# EAGLE board BLDC_logic_v1 (EAGLE 9.6.2)
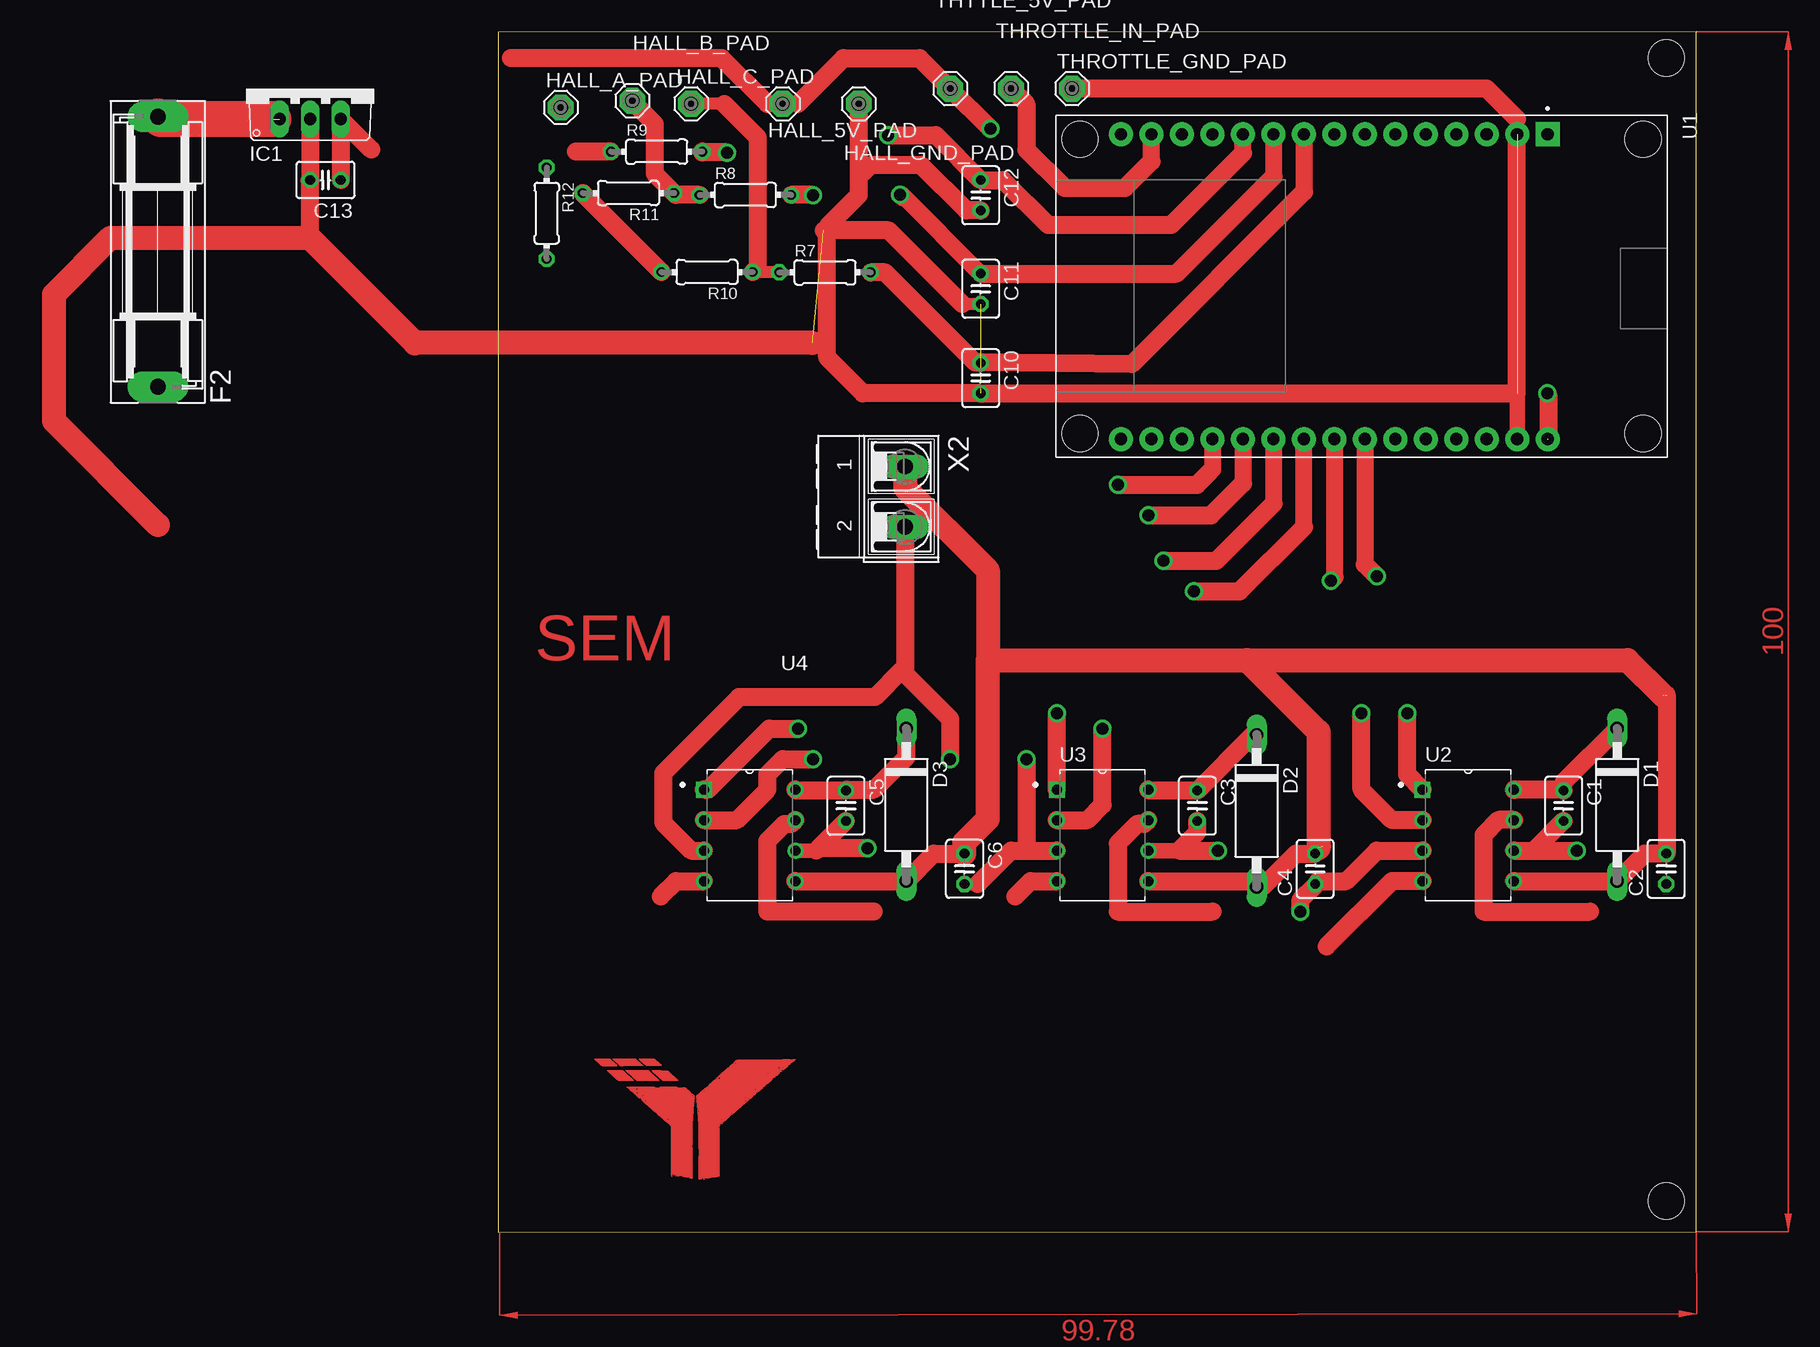
[diagram p0: board, top side]
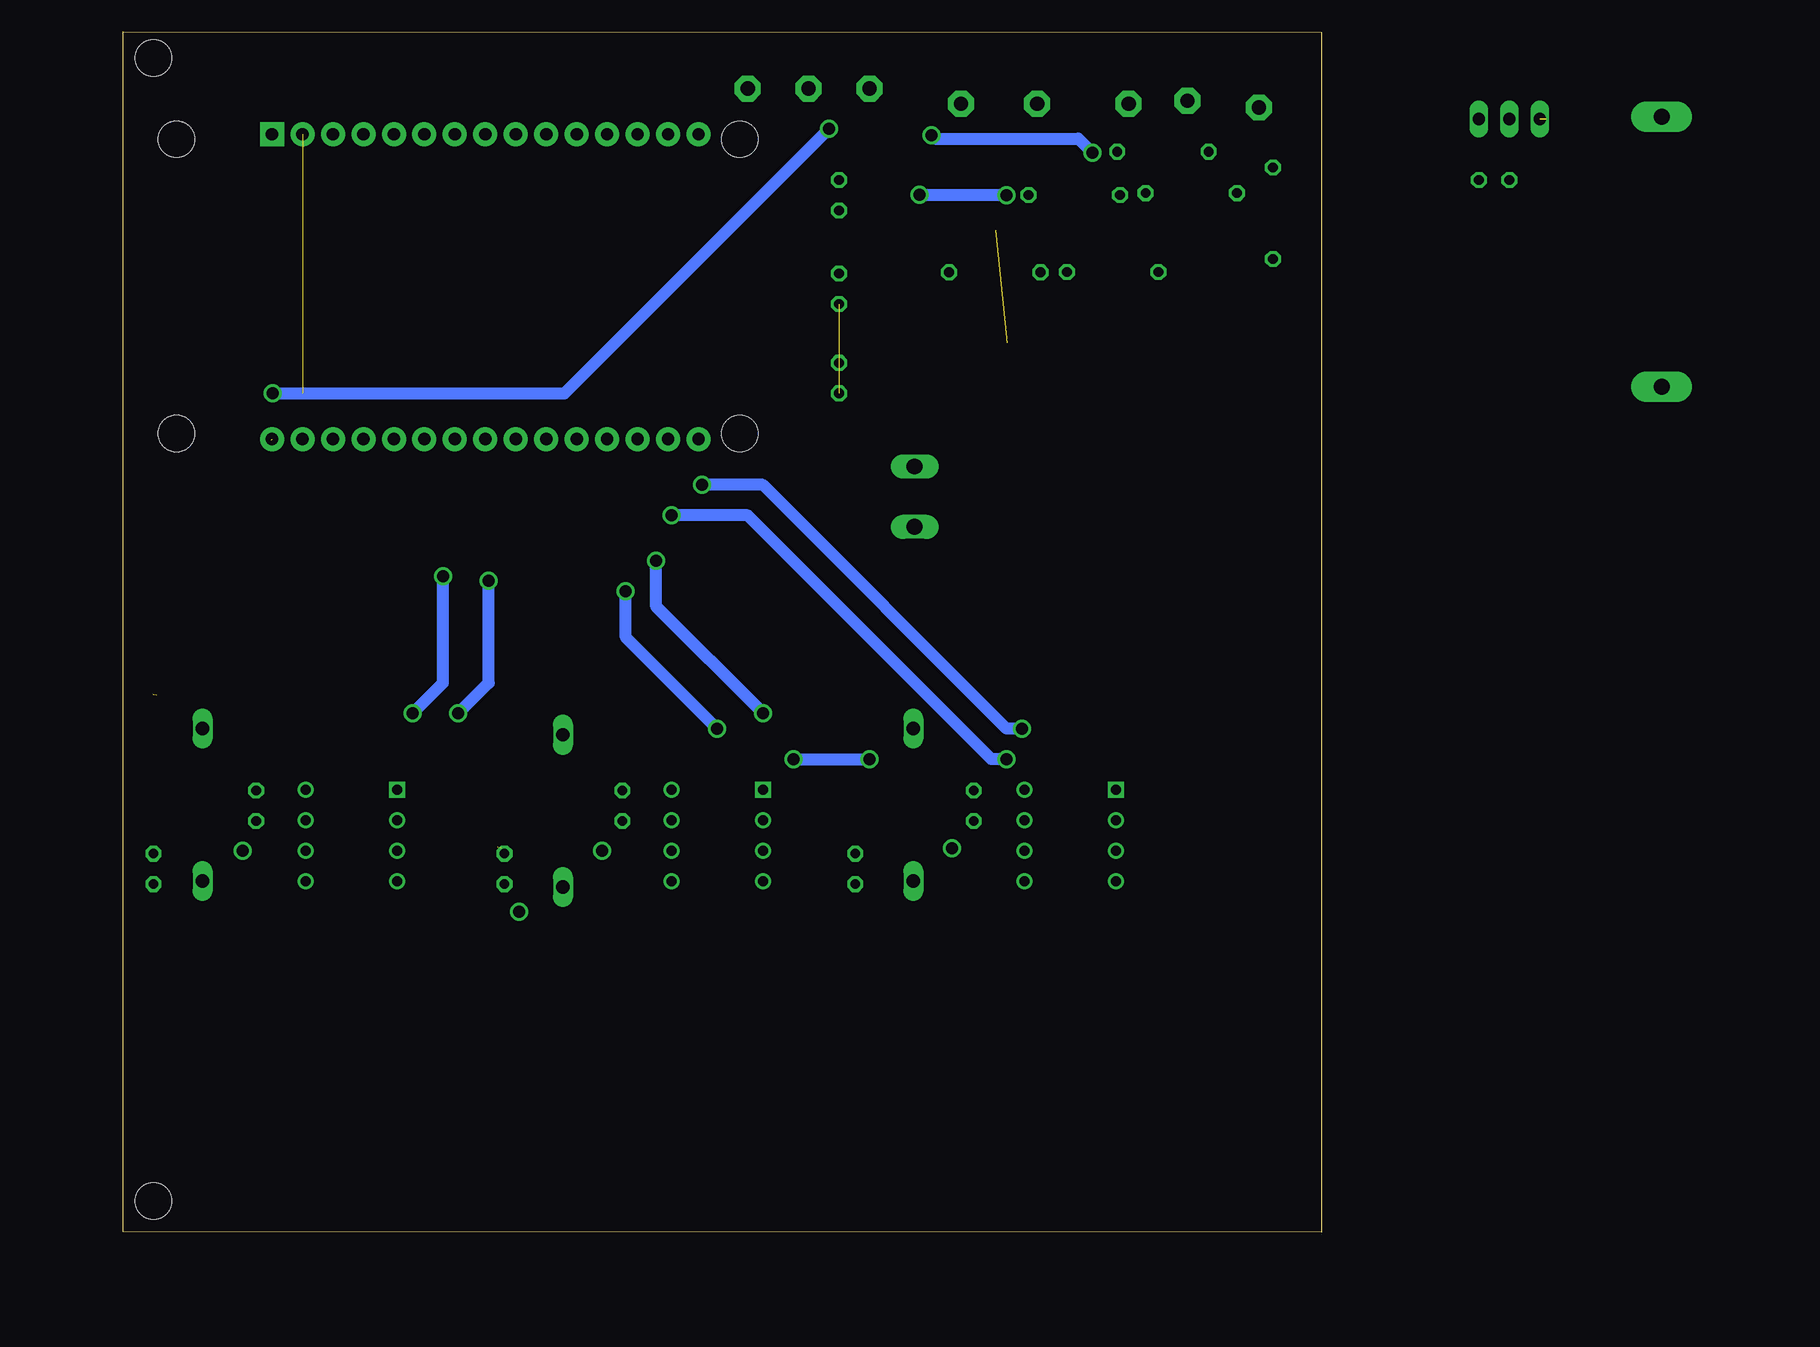
[diagram p1: board, bottom side, seen from below]

Size 99.88 x 100.08 mm. Coordinates in mm from the lower left corner, seen from the top.
Outline: 0,0 99.88,0.08 99.88,100.08 0,100 0,0
Copper layers (1*16): Top 0.035mm / dielectric 1.5mm / Bottom 0.035mm
Design rules "BLDC_schematic_v14 *": minimum track width 0.8mm, minimum drill 0.35mm, track to track 0.8mm, track to pad 0.8mm, pad to pad 0.205mm, via to via 0.205mm, smd to smd 6mil, copper to edge 40mil, drill to drill 6mil, minimum pad ring 10mil, minimum via ring 8mil, stop-mask expansion 4mil, vias tented up to drill 0mil, thermal gap 10mil
Net classes: 0 default: clearance 0.205 mm
Holes 3 mm at 97.36,2.62 97.36,97.87

## Footprints (pad centres in the part's own frame; a part is rotated, then mirrored left to right if it is on the bottom)
C025-030X050 = drill 0.813 octagon: 1 -1.27,0; 2 1.27,0
DO15-12 = drill 1.118 long: A 6.35,0; C -6.35,0
SH22,5 = drill 1.321 pad 2.54 long: 1 -11.252,0; 2 11.252,0
MCS08 = drill 1.194 pad 2.159 octagon: MP 0,0
TO220V = drill 1.016 long: 1 -2.54,-2.54; 2 0,-2.54; 3 2.54,-2.54
0204/7 = drill 0.813 octagon: 1 -3.81,0; 2 3.81,0
MODULE_ESP32_DEVKIT_V1 = drill 1.02 pad 2 square: 1 -12.7,15.515 | drill 1.02 pad 2: 2 -12.7,12.975; 3 -12.7,10.435; 4 -12.7,7.895; 5 -12.7,5.355; 6 -12.7,2.815; 7 -12.7,0.275; 8 -12.7,-2.265; 9 -12.7,-4.805; 10 -12.7,-7.345; 11 -12.7,-9.885; 12 -12.7,-12.425; 13 -12.7,-14.965; 14 -12.7,-17.505; 15 -12.7,-20.045; 16 12.7,-20.045; 17 12.7,-17.505; 18 12.7,-14.965; 19 12.7,-12.425; 20 12.7,-9.885; 21 12.7,-7.345; 22 12.7,-4.805; 23 12.7,-2.265; 24 12.7,0.275; 25 12.7,2.815; 26 12.7,5.355; 27 12.7,7.895; 28 12.7,10.435; 29 12.7,12.975; 30 12.7,15.515 | hole 3: -12.28,-23.475; 12.23,-23.475; 12.23,23.475; -12.28,23.475
DIP762W45P254L1092H533Q8 = drill 0.83 square: 1 -3.81,3.81 | drill 0.83: 2 -3.81,1.27; 3 -3.81,-1.27; 4 -3.81,-3.81; 5 3.81,-3.81; 6 3.81,-1.27; 7 3.81,1.27; 8 3.81,3.81
AK500/2-H = drill 1.321 long: 1 -2.515,0; 2 2.515,0

## Placement (x,y rotation side)
C1  [C025-030X050]  88.8,35.56 270 top
C2  [C025-030X050]  97.36,30.3 90 top
C3  [C025-030X050]  58.27,35.56 270 top
C4  [C025-030X050]  68.1,30.3 90 top
C5  [C025-030X050]  28.98,35.56 270 top
C6  [C025-030X050]  38.86,30.3 270 top
C10  [C025-030X050]  40.21,71.2 270 top
C11  [C025-030X050]  40.21,78.64 270 top
C12  [C025-030X050]  40.21,86.44 270 top
C13  [C025-030X050]  -14.4,87.71 180 top  (outside the outline)
D1  1N5060GP  [DO15-12]  93.27,35.64 270 top
D2  1N5060GP  [DO15-12]  63.22,35.13 270 top
D3  1N5060GP  [DO15-12]  34.01,35.64 270 top
F2  [SH22,5]  -28.37,81.74 90 top  (outside the outline)
HALL_5V_PAD  MCS08  [MCS08]  23.7,94.06 0 top
HALL_A_PAD  MCS08  [MCS08]  5.21,93.75 0 top
HALL_B_PAD  MCS08  [MCS08]  11.18,94.31 0 top
HALL_C_PAD  MCS08  [MCS08]  16.08,94.06 0 top
HALL_GND_PAD  MCS08  [MCS08]  30.05,94.06 0 top
IC1  788TV  [TO220V]  -15.67,95.33 0 top  (outside the outline)
R7  [0204/7]  27.23,80.01 0 top
R8  [0204/7]  20.6,86.46 0 top
R9  [0204/7]  13.21,90.07 0 top
R10  [0204/7]  17.4,80.04 180 top
R11  [0204/7]  10.85,86.61 180 top
R12  [0204/7]  4.04,84.94 270 top
THROTTLE_GND_PAD  MCS08  [MCS08]  47.83,95.33 0 top
THROTTLE_IN_PAD  MCS08  [MCS08]  42.75,95.33 0 top
THTTLE_5V_PAD  MCS08  [MCS08]  37.67,95.33 0 top
U1  ESP32-DEVKIT-V1  [MODULE_ESP32_DEVKIT_V1]  71.96,78.82 270 top
U2  IR2183  [DIP762W45P254L1092H533Q8]  80.85,33.1 0 top
U3  IR2183  [DIP762W45P254L1092H533Q8]  50.37,33.1 0 top
U4  IR2183  [DIP762W45P254L1092H533Q8]  20.96,33.1 0 top
X2  [AK500/2-H]  33.91,61.32 270 top

## Library data of the parts
C1-C6 C10-C13 = rcl; SPICEPREFIX: C
D1-D3 = diode
F2 = fuse; MF: SCHURTER; MPN: 0031.8201; OC_FARNELL: 1162740; OC_NEWARK: 96F8317
HALL_5V_PAD HALL_A_PAD HALL_B_PAD HALL_C_PAD HALL_GND_PAD THROTTLE_GND_PAD THROTTLE_IN_PAD THTTLE_5V_PAD = solpad
IC1 = linear
R7-R12 = rcl; SPICEPREFIX: R
U1 = ESP32-DEVKIT-V1; AVAILABILITY: Not in stock; DESCRIPTION: Dual core, Wi-Fi: 2.4 GHz up to 150 Mbits/s,BLE (Bluetooth Low Energy) and legacy Bluetooth, 32 bits, Up to 240 MHz; MF: Do it; MP: ESP32-DEVKIT-V1; PACKAGE: None; PRICE: None
U2-U4 = IR2183; AVAILABILITY: In Stock; DESCRIPTION: Half-Bridge Gate Driver IC Inverting, Non-Inverting 14-SOIC; MF: Infineon; MP: IR2183; PACKAGE: DIP-8 International Rectifier; PRICE: None; PURCHASE-URL: https://pricing.snapeda.com/search/part/IR2183/?ref=eda
X2 = con-ptr500; OC_FARNELL: unknown; OC_NEWARK: unknown

## Nets
5V: HALL_5V_PAD.MP THTTLE_5V_PAD.MP U1.30
17V: C2.2 C4.2 C6.1 D1.A D2.A D3.A U2.5 U3.5 U4.5 X2.1
GND: C10.2 C11.2 C12.2 C13.2 HALL_GND_PAD.MP IC1.2 THROTTLE_GND_PAD.MP U1.2 U1.29
HALL_A: C12.1 R9.2 U1.11
HALL_B: C11.1 R8.2 U1.10
HALL_C: C10.1 R7.2 U1.9
HIN_1: U1.24 U2.1
HIN_2: U1.21 U3.1
HIN_3: U1.19 U4.1
HO_1: U2.7
HO_2: U3.7
HO_3: U4.7
LIN_1: U1.23 U2.2
LIN_2: U1.22 U3.2
LIN_3: U1.20 U4.2
LO_1: U2.4
LO_2: U3.4
LO_3: U4.4
N$1: C3.1 D2.C U3.8
N$2: C5.1 D3.C U4.8
N$3: C1.1 D1.C U2.8
N$13: F2.2 IC1.1
N$15: HALL_B_PAD.MP R8.1 R11.1
N$16: HALL_C_PAD.MP R7.1 R10.1
S$1: C13.1 IC1.3
S$2: C4.1 U2.3
S$3: C6.2 U3.3 U4.3 X2.2
S$4: R10.2 R11.2
S$5: R9.1
S$10: C1.2 U2.6
S$14: C3.2 U3.6
S$15: C5.2 U4.6
THROTTLE: THROTTLE_IN_PAD.MP U1.14

## Tracks (layer width: path | path; a pad name or v marks a point on that pad's centre or on a via)
5V  (via drill 1)  (1 unrouted)
  Top 1: 22.43,94.06 HALL_5V_PAD.MP 24.97,94.06 | 40.95,92.05 41.05,92.05 v41.05,91.97
  Top 1.5: 22.43,94.06 18.62,97.87 1.07,97.87 | 24.97,94.06 28.78,97.87 35.13,97.87 THTTLE_5V_PAD.MP 40.95,92.05 | v87.43,69.93 87.53,69.82 87.53,66.04
  Bottom 1: v41.05,91.97 63.12,69.9 87.43,69.9 v87.43,69.93
17V  (2 unrouted)
  Top 1.5: 97.38,44.83 97.38,31.6 C2.2 95.56,31.57 D1.A U2.5 | 68.68,32.16 C4.2 66.5,31.57 63.7,28.78 D2.A 62.71,29.29 U3.5 | U4.5 D3.A 36.3,31.57 C6.1
  Top 2: X2.1 33.91,62.08 40.82,55.17 40.82,47.7 | 40.82,47.7 40.82,34.47 38.86,32.51 C6.1 | 40.82,47.7 62.41,47.7 | 68.38,32.06 68.38,41.73 62.41,47.7 | 62.41,47.7 94.13,47.7 97.08,44.76
GND  (3 unrouted)
  Top 1: C10.2 40.02,69.73 | U1.2 84.93,92.79 | C11.2 38.68,77.37
  Top 1.2: 30.05,88.34 30.43,88.34
  Top 1.3: U1.29 84.93,69.93 | 84.88,91.47 U1.2
  Top 1.5: HALL_GND_PAD.MP 30.05,88.34 30.05,86.44 27.41,83.79 27.41,72.92 30.4,69.93 C10.2 84.88,69.93 84.88,91.47 | 84.93,92.79 82.39,95.33 THROTTLE_GND_PAD.MP | 30.43,88.34 31.04,88.95 35.23,88.95 39.01,85.17 C12.2 | 27.13,83.52 32.54,83.52 38.68,77.37 | IC1.2 C13.2 -15.72,87.66 -15.72,82.88
  Top 2: -28.37,58.95 -37.03,67.62 -37.03,78.18 -32.33,82.88 -15.72,82.88 -6.93,74.09 -6.88,74.14 26.19,74.14
HALL_A  (via drill 1)
  Top 1.4: 62.08,89.94 U1.11
  Top 1.5: v32.49,91.44 36.47,91.44 C12.1 42.09,87.71 45.82,83.97 56.11,83.97 62.08,89.94 | R9.2 17.02,90.02 19.02,90.02 v19.08,89.97
  Bottom 1: v32.49,91.44 32.21,91.16 20.27,91.16 v19.08,89.97
HALL_B  (via drill 1)
  Top 1: C11.1 40.33,79.96
  Top 1.4: 33.76,86.21 v33.5,86.46 33.66,86.46 C11.1 | U1.10 64.61,87.99 64.62,87.99
  Top 1.5: R8.2 26.21,86.46 v26.24,86.44 | 64.62,87.99 56.54,79.91 C11.1 40.21,79.93 | 33.55,86.41 v33.5,86.46
  Bottom 1: v33.5,86.46 26.26,86.46 v26.24,86.44
HALL_C
  Top 1: C10.1 40.16,72.52
  Top 1.4: U1.9 67.16,86.72
  Top 1.5: R7.2 32.26,80.01 39.75,72.52 40.16,72.52 | C10.1 40.26,72.52 52.81,72.37 67.16,86.72
HIN_1  (via drill 1)
  Top 1.4: U1.24 72.23,55.68 72.24,55.68
  Top 1.5: U2.1 75.77,38.18 v75.77,43.26 | 72.24,55.68 v73.23,54.69
  Bottom 1: v75.77,43.26 73.23,45.8 v73.23,54.69
HIN_2  (via drill 1)
  Top 1.4: U1.21 64.61,60.74 64.62,60.73
  Top 1.5: U3.1 v46.56,43.26 | v55.45,55.96 59.84,55.96 64.62,60.73
  Bottom 1: v46.56,43.26 55.45,52.15 v55.45,55.96
HIN_3  (via drill 1)
  Top 1.4: 59.36,63.42 59.53,63.6 U1.19
  Top 1.5: U4.1 17.5,36.91 22.58,41.99 v24.97,41.99 | v51.64,62.31 58.24,62.31 59.36,63.42
  Bottom 1: v24.97,41.99 26.24,41.99 46.56,62.31 v51.64,62.31
HO_1
  Top 1.5: U2.7 84.61,34.37 84.6,34.38 83.38,34.38 82.12,33.11 82.12,26.75 91.01,26.75
HO_2
  Top 1.5: U3.7 53.86,34.05 53.26,34.05 51.64,32.42 51.64,26.75 59.54,26.75
HO_3
  Top 1.5: 31.32,26.75 22.43,26.75 22.43,32.63 23.85,34.05 24.44,34.05 U4.7
LIN_1  (via drill 1)
  Top 1.4: U1.23 69.69,54.61 v69.42,54.33
  Top 1.5: U2.2 74.5,34.37 71.96,36.91 v71.96,43.26 | v69.42,54.33 69.7,54.61
  Bottom 1: v71.96,43.26 69.42,45.8 v69.42,54.33
LIN_2  (via drill 1)
  Top 1.4: 67.16,58.78 U1.22
  Top 1.5: U3.2 49.1,34.37 50.37,35.64 v50.37,41.99 | v57.99,53.42 61.8,53.42 67.16,58.78
  Bottom 1: v50.37,41.99 57.99,49.61 v57.99,53.42
LIN_3  (via drill 1)
  Top 1.4: U1.20 62.07,62.44 62.08,62.43
  Top 1.5: U4.2 19.89,34.37 22.43,36.91 22.43,38.18 23.7,39.45 v26.24,39.45 | v54.18,59.77 59.41,59.77 62.08,62.43
  Bottom 1: v26.24,39.45 27.51,39.45 47.83,59.77 v54.18,59.77
LO_1
  Top 1.5: U2.4 74.5,29.29 69.05,23.83
LO_2
  Top 1.5: 43.1,28.02 44.37,29.29 U3.4
LO_3
  Top 1.5: 13.54,28.02 14.81,29.29 U4.4
N$1
  Top 1.5: U3.8 54.25,36.83 C3.1 62.92,41.48 D2.C
N$2
  Top 1.5: U4.8 24.84,36.83 C5.1 29.06,36.91 31.32,36.91 34.01,39.6 D3.C
N$3
  Top 1.5: D1.C 88.8,37.52 C1.1 88.75,36.88 84.68,36.88 U2.8
N$13  (1 unrouted)
  Top 3: -18.73,92.79 -28.17,92.79 F2.2
N$15
  Top 1.5: R8.1 14.81,86.46 R11.1 13.03,88.24 13.03,92.38 11.18,94.23 HALL_B_PAD.MP
N$16
  Top 1: R7.1 21.23,80.01 R10.1 | 18.82,94.06 HALL_C_PAD.MP
  Top 1.5: R10.1 21.62,80.44 21.62,91.26 18.82,94.06
S$1
  Top 1.5: -10.59,90.25 IC1.3 C13.1
S$2  (via drill 1)
  Top 1: 68.35,29.29 C4.1 68.15,28.98
  Top 1.5: U2.3 73.23,31.83 70.69,29.29 68.35,29.29 | 68.15,28.98 66.88,27.71 v66.88,26.75
S$3  (via drill 1)
  Top 1: C6.2 39.95,29.03
  Top 1.5: U4.3 16.08,31.83 13.74,34.16 13.74,38.28 20.07,44.6 31.39,44.6 33.63,46.84 33.91,46.56 | 39.95,29.03 42.75,31.83 44.02,31.83 | 44.02,31.83 U3.3 | v44.02,39.45 44.02,31.83 | v37.67,39.45 37.67,42.8 33.91,46.56 | X2.2 33.91,46.56
  Bottom 1: v44.02,39.45 v37.67,39.45
S$4
  Top 1.5: R10.2 13.59,80.06 R11.2
S$5
  Top 1.5: R9.1 6.45,90.07
S$10  (via drill 1)
  Top 1.5: v89.9,31.81 89.89,31.8 89.87,31.83 86.33,31.83 | C1.2 86.33,31.83 | U2.6 86.33,31.83
S$14  (via drill 1)
  Top 1.3: U3.6 56.74,31.83
  Top 1.5: v59.97,31.8 59.94,31.83 56.74,31.83 58.27,33.35 C3.2
S$15  (via drill 1)
  Top 1.2: 26.52,31.83 U4.6
  Top 1.5: v30.79,32.03 30.76,32.06 26.75,32.06 | C5.2 26.75,32.06 | 26.75,32.06 26.52,31.83
THROTTLE
  Top 1.4: 54.45,89.25 U1.14
  Top 1.5: THROTTLE_IN_PAD.MP 44.02,94.06 44.02,90.25 47.22,87.05 52.25,87.05 54.45,89.25
(copper drawn outside any net)
  shapes: Top area x1577

## Text on the board
Top: SEM